# Altium PCB Carte_Alim-light_clav.PcbDoc
Units mm, origin at the board's own origin, x right, y up, seen from the top; angles counter-clockwise.
Board outline 100 x 16 mm, 4 copper layers (Top Copper, Ground Plane, Power Plane, Bottom Copper), stack 1.57 mm thick; 44 components, 108 nets, 128 pads, 82 vias.
Unrouted connection lines stored in the file: 6.
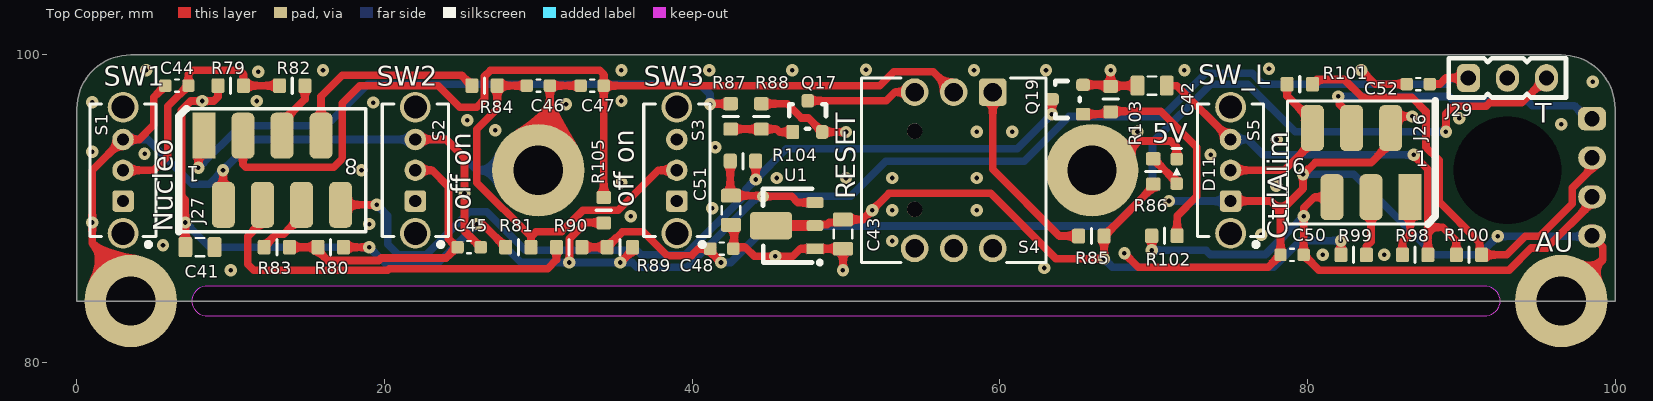
[diagram p0: Top Copper view]
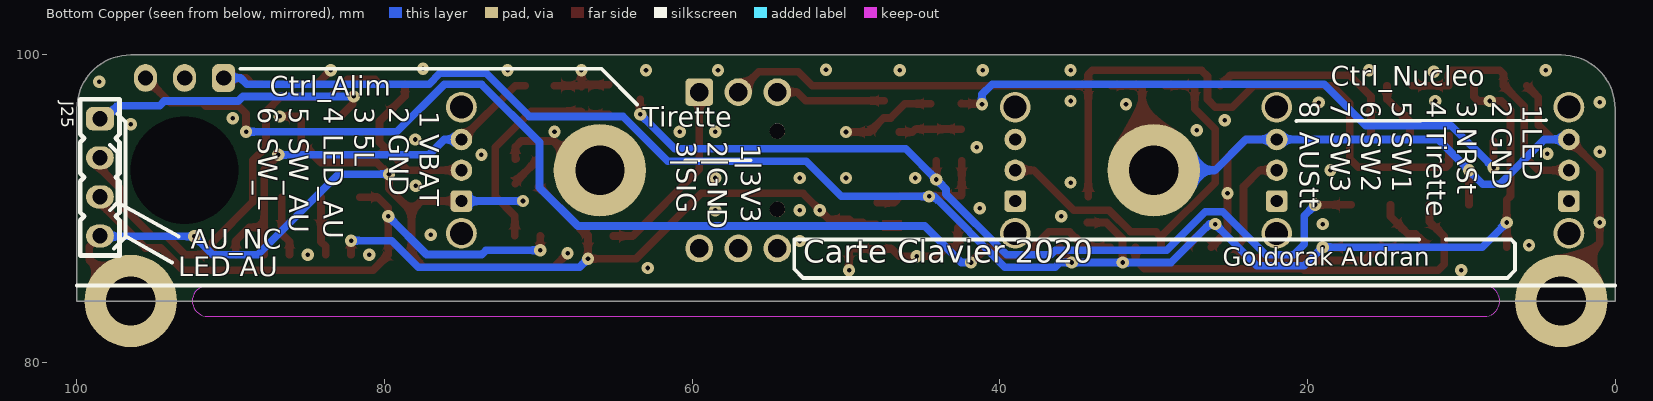
[diagram p1: Bottom Copper view, seen from below]
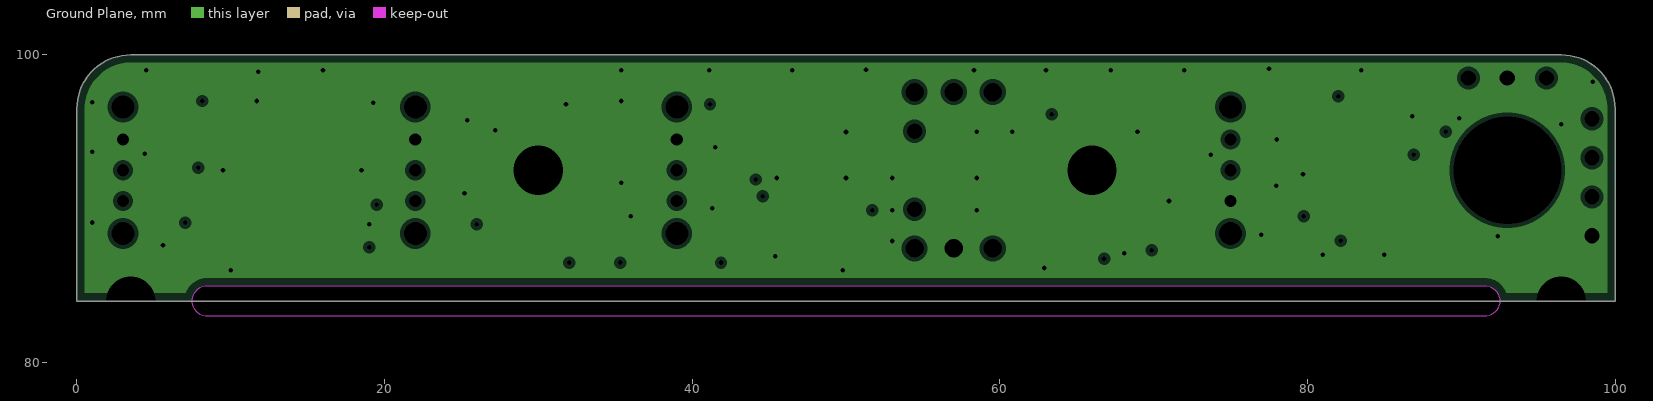
[diagram p2: Ground Plane, clearances drawn from the general rule]
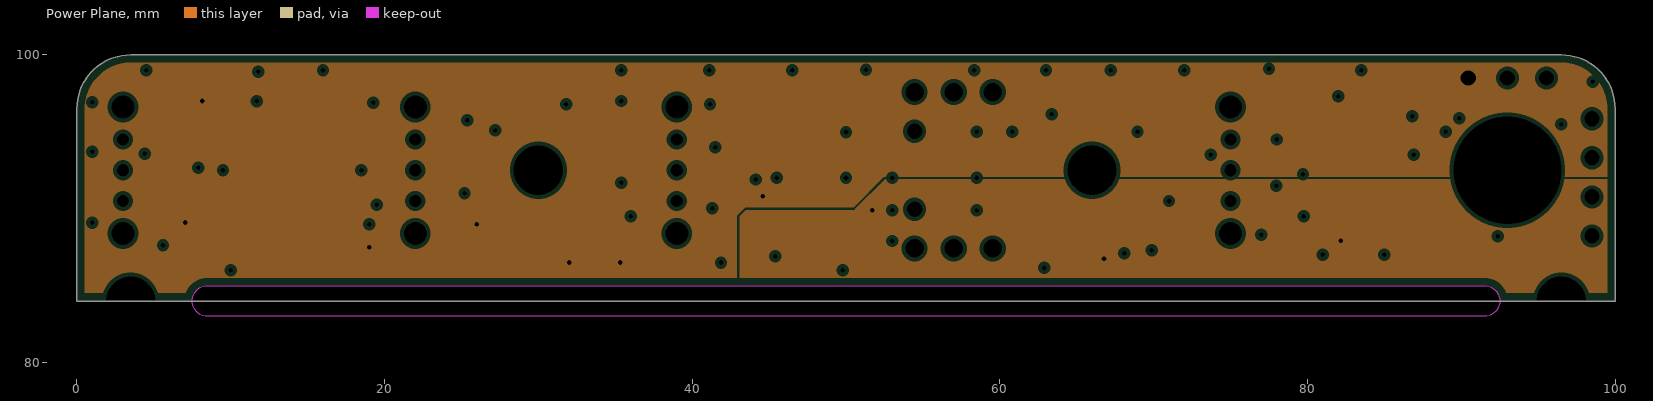
[diagram p3: Power Plane, clearances drawn from the general rule]
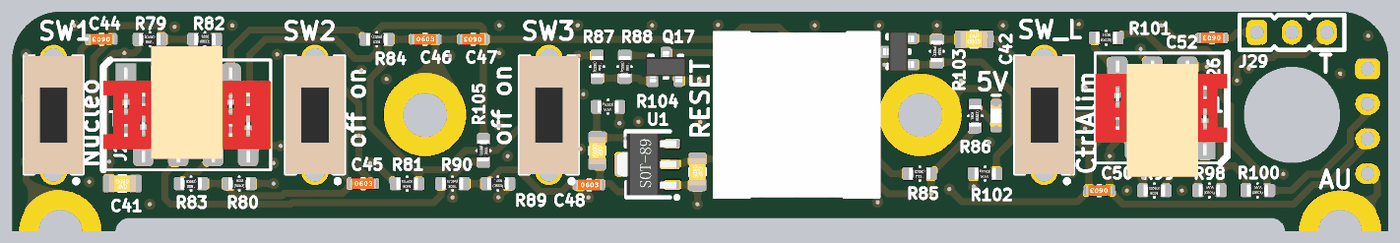
[diagram p4: 3D render of the assembled board from above, using the file's embedded part models]

## Layer stack, top to bottom
Top Mask: solder mask 0.015, Solder Resist, Dk 3.8
Top Copper: signal copper 0.035
Dielectric 1: prepreg 0.2, 7628, Dk 4.6
Ground Plane: plane copper 0.0175, net GND
Core: core 1.065, FR-4, Dk 4.5
Power Plane: plane copper 0.0175
Dielectric 2: prepreg 0.2, 7628, Dk 4.6
Bottom Copper: signal copper 0.035
Bottom Mask: solder mask 0.015, Solder Resist, Dk 3.8

## Board outline
0,84 100,84 100,96.5 ccw(c96.5,96.5) 96.5,100 3.5,100 ccw(c3.5,96.5) 0,96.5
cut-out: 8.5,83 cw(c8.5,84) 8.5,85 91.5,85 cw(c91.5,84) 92.5,84 cw(c91.5,84) 91.5,83

## Design rules (kind name [scope] priority, off if disabled: settings)
AssemblyTestPointUsage [All] p1 off:
AssemblyTestpoint [All] p1 off: testpointundercomponent=TRUE minsize=1.016 maxsize=2.54 preferedsize=1.524 minholesize=0 maxholesize=1.016 preferedholesize=0.813 testpointgrid=0.025 usegrid=TRUE gridtolerance=0 allowsidetop=TRUE allowsidebottom=TRUE
BoardOutlineClearance [All] p1: gap=0.2 ignorepadtopadclearanceinfootprint=FALSE
Clearance Clearance_Power [InNetClass('Power') vs InNet('GND')] p1: gap=0.2 ignorepadtopadclearanceinfootprint=TRUE
Clearance Clearance_Outer_layer [OnOutside] p2: gap=0.127 ignorepadtopadclearanceinfootprint=FALSE except(0.09: Arc-Arc Arc-Track Track-Track; 0.2: Arc-SMDPad Track-SMDPad; 0.254: Arc-Hole Track-Hole SMDPad-Hole THPad-Hole Via-Hole Fill-Hole Poly-Hole Region-Hole Text-Hole; 0.33: Arc-THPad Track-THPad SMDPad-THPad; 0.54: THPad-THPad)
Clearance Clearance_Inner_layer [not OnOutside] p3: gap=0.127 ignorepadtopadclearanceinfootprint=FALSE except(0.2: Arc-SMDPad Track-SMDPad; 0.254: Arc-Hole Track-Hole SMDPad-Hole THPad-Hole Via-Hole Fill-Hole Poly-Hole Region-Hole Text-Hole; 0.33: Arc-THPad Track-THPad SMDPad-THPad; 0.54: THPad-THPad)
ComponentClearance [IsComponent and (not (InComponent('J202') or InComponent('J204'))) vs IsComponent and (not (InComponent('J201') or InComponent('J203')))] p1: gap=0.2 collisioncheckmode=3 verticalgap=2540 showdistances=FALSE
DiffPairsRouting [All] p1 off: maxlimit=0.254 minlimit=0.254 mostfreqgap=0.254 toplayer_minwidth=0.381 toplayer_maxwidth=0.381 toplayer_prefwidth=0.381 bottomlayer_minwidth=0.381 bottomlayer_maxwidth=0.381 bottomlayer_prefwidth=0.381 maxuncoupledlength=12.7
FabricationTestPointUsage TestPointUsage [All] p1 off: valid=0 allowmultiple=FALSE
FabricationTestpoint Testpoint [All] p1 off: side=3 testpointundercomponent=TRUE minsize=1.016 maxsize=2.54 preferedsize=1.524 minholesize=0 maxholesize=1.016 preferedholesize=0.813 testpointgrid=0.025 allowsidetop=TRUE allowsidebottom=TRUE usegrid=TRUE gridtolerance=0
FanoutControl Fanout_BGA [IsBGA] p1 off: bgadir=Out bgaviamode=Centered fanoutstyle=Auto fanoutdirection=Alternating viagrid=0.025 // Fanout_BGA (Default Rule)
FanoutControl Fanout_LCC [IsLCC] p2 off: bgadir=Out bgaviamode=Centered fanoutstyle=Auto fanoutdirection=Alternating viagrid=0.025 // Fanout_LCC (Default Rule)
FanoutControl Fanout_SOIC [IsSOIC] p3 off: bgadir=Out bgaviamode=Centered fanoutstyle=Auto fanoutdirection=Alternating viagrid=0.025 // Fanout_SOIC (Default Rule)
FanoutControl Fanout_Small [(CompPinCount < 5)] p4 off: bgadir=Out bgaviamode=Centered fanoutstyle=Auto fanoutdirection=OutThenIn viagrid=0.025 // Fanout_Small (Default Rule)
FanoutControl Fanout_Default [All] p5 off: bgadir=Out bgaviamode=Centered fanoutstyle=Auto fanoutdirection=Alternating viagrid=0.025 // Fanout_Default (Default Rule)
HoleSize [All] p1: absolutevalues=TRUE maxlimit=6.3 minlimit=0.2 maxpercent=80.000 minpercent=20.000
HoleToHoleClearance ViaToViaClearance [IsVia vs IsVia] p1: gap=0.254 allowstackedmicrovias=TRUE
HoleToHoleClearance [All] p2: gap=0.54 allowstackedmicrovias=TRUE
MinimumAnnularRing [All] p1: minimumring=0.13
MinimumSolderMaskSliver [All] p1: minsoldermaskwidth=0.075
NetAntennae NetAntenna [All] p1: netantennaetolerance=0
PlaneClearance [All] p1: clearance=0.254
PlaneConnect [All] p1: planeconnectstyle=Direct reliefexpansion=0.3 reliefentries=4 reliefconductorwidth=0.3 reliefairgap=0.2
PolygonConnect [All] p1: thpad.connectstyle=Relief thpad.reliefconductorwidth=0.2 thpad.reliefentries=4 thpad.polygonreliefangle="90 Angle" thpad.airgapwidth=0.254 smdpad.connectstyle=Relief smdpad.reliefconductorwidth=0.2 smdpad.reliefentries=4 smdpad.polygonreliefangle="90 Angle" smdpad.airgapwidth=0.254 via.connectstyle=Direct via.reliefconductorwidth=0.2 via.reliefentries=4 via.polygonreliefangle="90 Angle" via.airgapwidth=0.254
RoutingVias [All] p1: holewidth=0.2 width=0.5 viastyle="Through Hole" minholewidth=0.2 minwidth=0.45 maxholewidth=0.3 maxwidth=0.9
SMDEntry [All] p1: side=TRUE corner=TRUE anyangle=TRUE
SilkToSilkClearance [All] p1 off: silktosilkclearance=0.15
SilkToSolderMaskClearance [IsPad] p1: minsilkscreentomaskgap=0.15 clearancetoexposedcopper=TRUE
SolderMaskExpansion [All] p1: expansion=0.05 istentingtop=FALSE
Width Width_Outer_Layer [OnLayer('Component Side') or OnLayer('Solder Side')] p1: maxlimit=5 minlimit=0.09 preferedwidth=0.15
Width Width_Inner_Layer [All] p2: maxlimit=5 minlimit=0.127 preferedwidth=0.15
11 further rules are at their usual default settings.

## Classes and differential pairs
net class Power_low: 3L_CAP 3L_CLAV 3L_M 5L_CAP 5L_CLAV
component class Carte_Alim_TOP: C? D? DC? F? FB? J? Q? R?
net class Power: 5L 5P 12V ALIM_AU BATT_P MOT1_N MOT1_P MOT2_N MOT2_P PWR SW_AU SW_L VBATT VBATT_CLAV

## Components (designator, comment, footprint, x,y, rotation, side; value= is the part's Value field where it differs from the comment)
C41 "1uF" "WCAP-CSGP_0805, 2x1.25x1.25" 8,87.5 r180 top
C42 "1uF" "WCAP-CSGP_0805, 2x1.25x1.25" 69.9,98 r0 top
C43 "10uF" "WCAP-CSGP_0805, 2x1.25x1.25" 49.8,88.35 r270 top
C44 "100nF" "WCAP-CSGP_0603, 1.6x0.8x0.8" 6.5,98 r180 top
C45 "100nF" "WCAP-CSGP_0603, 1.6x0.8x0.8" 25.5,87.5 r0 top
C46 "100nF" "WCAP-CSGP_0603, 1.6x0.8x0.8" 30,98 r0 top
C47 "100nF" "WCAP-CSGP_0603, 1.6x0.8x0.8" 33.5,98 r180 top
C48 "100nF" "WCAP-CSGP_0603, 1.6x0.8x0.8" 41.925,87.4 r0 top
C50 "100nF" "WCAP-CSGP_0603, 1.6x0.8x0.8" 79,87 r180 top
C51 "10uF" "WCAP-CSGP_0805, 2x1.25x1.25" 42.525,89.9 r270 top
C52 "100nF" "WCAP-CSGP_0603, 1.6x0.8x0.8" 87.2,98.1 r180 top
D11 "150060RS75000" SMCW_0603 71.5,92.424 r270 top value=Rouge
J25 "22-03-2041" 22-03-2041 98.5,92.04 r90 bottom
J26 "690367280676" 690367280676 83.5,93 r0 top value=6
J27 "690367280876" 690367280876 12.7,92.5 r180 top value=8
J29 "22-03-2031" 22-03-2031 93,98.5 r180 top
Q17 "2N7002" SOT-23 47.5,96 r0 top
Q19 "2N7002" SOT-23 64.4,97.1 r90 top
R79 "RC0603FR-0710KL" RESC1608X06N 10,98 r180 top value=10k
R80 "RC0603FR-0710KL" RESC1608X06N 16.5,87.5 r0 top value=10k
R81 "RC0603FR-0710KL" RESC1608X06N 28.7,87.5 r180 top value=10k
R82 "RC0603FR-0768RL" RESC1608X06N 14,98 r0 top value=68
R83 "RC0603FR-0768RL" RESC1608X06N 13,87.5 r180 top value=68
R84 "RC0603FR-0768RL" RESC1608X06N 26.5,98 r180 top value=68
R85 "RC0603FR-071KL" RESC1608X06N 65.95,88.225 r180 top value=1k
R86 "RC0603FR-071K8L" RESC1608X06N 69.975,92.424 r90 top value=1.8k
R87 "RC0603FR-0768RL" RESC1608X06N 42.5,96 r270 top value=68
R88 "RC0603FR-0710KL" RESC1608X06N 44.5,96 r270 top value=10k
R89 "RC0603FR-0710KL" RESC1608X06N 35.3,87.5 r0 top value=10k
R90 "RC0603FR-0768RL" RESC1608X06N 32,87.5 r180 top value=68
R98 "RC0603FR-070RL" RESC1608X06N 87,87 r0 top value=0
R99 "RC0603FR-070RL" RESC1608X06N 83,87 r180 top value=0
R100 "RC0603FR-070RL" RESC1608X06N 90.5,87 r0 top value=0
R101 "RC0603FR-070RL" RESC1608X06N 79.5,98.1 r0 top value=0
R102 "RC0603FR-0710KL" RESC1608X06N 70.7,88.232 r180 top value=10k
R103 "RC0603FR-0710KL" RESC1608X06N 67.2,97.125 r270 top value=10k
R104 "RC0603FR-0710KL" RESC1608X06N 43.3,93.1 r180 top value=10k
R105 "RC0603FR-0710KL" RESC1608X06N 34.25,89.9 r270 top value=10k
S1 "OS102011MS2QN1" SW_OS102011MS2QN1 3,92.5 r90 top locked
S2 "OS102011MS2QN1" SW_OS102011MS2QN1 22,92.5 r90 top locked
S3 "OS102011MS2QN1" SW_OS102011MS2QN1 39,92.5 r90 top locked
S4 "440GS67082622" 440xx67082622 57,92.5 r90 top locked
S5 "OS102011MS2QN1" SW_OS102011MS2QN1 75,92.5 r90 top locked
U1 "HT7533-1" SOT89-150P350X160-3N 45.85,88.9 r180 top value=3.3V

## Footprints (in the part's own frame and the unit in brackets; to place one, negate y for a bottom-side part, rotate by r counter-clockwise, add the part's x,y. Pads: shape width x height; smd on the part's side, far side on the other; paste and mask are expansions set on the pad)
22-03-2031 [mm]
  rrect50% 1.5x1.8 hole 1: 1(2.54,0)
  oval 1.5x1.8 hole 1: 2(0,0) 3(-2.54,0)
  silkscreen extent -3.81,-1.27 3.81,1.27, body extent -3.81,-1.27 3.81,1.27, height 11.6
22-03-2041 [mm]
  rrect50% 1.5x1.8 hole 1: 1(3.81,0)
  oval 1.5x1.8 hole 1: 2(1.27,0) 3(-1.27,0) 4(-3.81,0)
  silkscreen extent -5.08,-1.27 5.08,1.27, body extent -5.08,-1.27 5.08,1.27, height 11.6
440xx67082622 [mm]
  rrect30% 1.8x1.8 hole 1.2: 1(5.08,-2.54)
  round 1.8 hole 1.2: 2(5.08,2.54) 3(-5.08,2.54) 4(-5.08,-2.54) A(5.08,0) B(-5.08,0)
  round 1 hole 1 unplated: MH1(-2.54,2.54) MH2(2.54,2.54)
  silkscreen extent -6,-6 6,6, body extent -6,-6 6,6, height 8.3
690367280676 [mm] "6 pins, SMT, straight, without Latch"
  rect 1.5x3 smd: 1(3.175,-2.25)
  rrect50% 1.5x3 smd: 2(1.905,2.25) 3(0.635,-2.25) 4(-0.635,2.25) 5(-1.905,-2.25) 6(-3.175,2.25)
  silkscreen extent -4.81,-4 4.81,4, body extent -4.81,-5 4.81,3.5, height 5.75
690367280876 [mm] "8 pins, SMT, straight, without Latch"
  rect 1.5x3 smd: 1(4.445,-2.25)
  rrect50% 1.5x3 smd: 2(3.175,2.25) 3(1.905,-2.25) 4(0.635,2.25) 5(-0.635,-2.25) 6(-1.905,2.25) 7(-3.175,-2.25) 8(-4.445,2.25)
  silkscreen extent -6.08,-4 6.08,4, body extent -6.08,-5 6.08,3.5, height 5.75
RESC1608X06N [mm] "Chip Resistor, 2-Leads, Body 1,6x0,8mm, IPC Medium Density"
  rrect30% 0.85x0.95 smd: 1(-0.825,0) 2(0.825,0)
  silkscreen extent 0,-0.5 0,0.5, body extent -0.77,-0.43 0.78,0.43, height 0.45
SMCW_0603 [mm] "Chip LED, 2-Leads, Body 1.6x0.8mm, IPC Medium Density"
  rrect30% 0.8x0.8 smd: 1(-0.8,0) 2(0.8,0)
  silkscreen extent -1.5,-0.3 0.25,0.3, body extent -0.8,-0.4 0.8,0.4, height 0.7
SOT89-150P350X160-3N [mm] "SOT89, 3-Leads, Body 4.5x4.1mm, Pitch 1.5mm, Lead Span 1.05mm, IPC Medium Density"
  rect 1.1x0.7 smd paste-0.05 mask+0.102: 1(-2.127,1.5)
  rrect50% 1.1x0.7 smd paste-0.05 mask+0.102: 2(-2.128,0)
  rrect30% 2.75x1.8 smd paste-10: 2(0.728,0)
  rrect30% 1.1x0.7 smd paste-0.05 mask+0.102: 3(-2.127,-1.5)
  Top Copper region: -1.8,-0.351 -0.5,-0.351 -0.5,0.348 -1.8,0.348
  silkscreen extent -2.57,-2.4 1.25,2.52, body extent -2.4,-2.25 1.9,2.25, height 1.53
SOT-23 [mm]
  rrect15% 0.8x0.9 smd: 1(-0.953,-1.016)
  rrect50% 0.8x0.9 smd: 2(0.953,-1.016) 3(0.013,1.016)
  silkscreen extent -1.2,-0.8 1.2,0.8, body extent -1.5,-1.13 1.5,1.13, height 1.22
SW_OS102011MS2QN1 [mm]
  rrect30% 1.4x1.4 hole 0.8: 1(-2,0)
  round 1.4 hole 0.8: 2(0,0) 3(2,0)
  round 2 hole 1.5: None(-4.1,0) None(4.1,0)
  silkscreen extent -4.98,-2.15 4.3,2.15, body extent -4.31,-2.16 4.29,2.14, height 8
"WCAP-CSGP_0603, 1.6x0.8x0.8" [mm] "WCAP-CSGP Ceramic Capacitors, size 0603, body 1.6x0.8x0.8"
  rrect30% 0.8x0.8 smd: 1(-0.75,0) 2(0.75,0)
  silkscreen extent -0.13,-0.4 0.13,0.4, body extent -1,-0.39 1,0.39, height 0.8
"WCAP-CSGP_0805, 2x1.25x1.25" [mm] "WCAP-CSGP Ceramic Capacitors, size 0805, body 2x1.25x1.25"
  rrect30% 0.9x1.3 smd: 1(-0.95,0) 2(0.95,0)
  silkscreen extent -0.28,-0.6 0.28,0.6, body extent -1,-0.63 1,0.62, height 1.25

## Part data
C41 C42: library part "WCAP-CSGP, 885012207103", "CAP CER 1uF 50V X7R 0805", Manufacturer="Wurth Elektronik", Manufacturer Part Number=885012207103, RatedVoltage=50V, CeramicType=X7R, ComponentLink1Description=Datasheet, ComponentLink1URL=http://katalog.we-online.com/pbs/datasheet/885012207103.pdf, Size=0805, SUPPLIER 2=JLCPCB, Supplier Footprint 2=0805, SUPPLIER PART NUMBER 2=C28323
C43 C51: library part "WCAP-CSGP, 885012207026", "CAP CER 10uF 10V X7R 0805", Manufacturer="Wurth Elektronik", Manufacturer Part Number=885012207026, RatedVoltage=10V, SUPPLIER PART NUMBER 1=2495189, CeramicType=X7R, ComponentLink1Description=Datasheet, ComponentLink1URL=http://katalog.we-online.com/pbs/datasheet/885012207026.pdf, Size=0805, SUPPLIER 1=Farnell, SUPPLIER 2=JLCPCB, Supplier Footprint 2=0805, SUPPLIER PART NUMBER 2=C15850
C44 C45 C46 C47 C48 C50 C52: library part "WCAP-CSGP, 885012206095", "CAP CER 100nF 50V X7R 0603", Manufacturer="Wurth Elektronik", Manufacturer Part Number=885012206095, RatedVoltage=50V, CeramicType=X7R, ComponentLink1Description=Datasheet, ComponentLink1URL=http://katalog.we-online.com/pbs/datasheet/885012206095.pdf, Size=0603, SUPPLIER 2=JLCPCB, Supplier Footprint 2=0603, SUPPLIER PART NUMBER 2=C14663
D11: library part "WL-SMCW 0603  150060RS75000", "SMD mono-color Chip LED, WL-SMCW, Red", Manufacturer="Wurth Elektronik", SUPPLIER PART NUMBER 1=2322071, ComponentLink1Description=Datasheet, ComponentLink1URL=http://katalog.we-online.com/led/datasheet/150060RS75000.pdf, Manufacturer Part Number=150060RS75000, SUPPLIER 1=Farnell, SUPPLIER 2=JLCPCB, Supplier Footprint 2=LED_0603, SUPPLIER PART NUMBER 2=C2286
J25: "CONN HEADER VERT 4POS 2.54MM", Manufacturer=MOLEX, SUPPLIER PART NUMBER 1=9731091, ComponentLink1Description=Datasheet, ComponentLink1URL=https://www.molex.com/pdm_docs/sd/022032041_sd.pdf, Manufacturer Part Number=22-03-2041, SUPPLIER 1=Farnell
J26: "WR-MM 6p Female SMT Connector with Polarization", Manufacturer="Wurth Electronics Inc.", SUPPLIER PART NUMBER 1=1641849, ComponentLink1Description=Datasheet, ComponentLink1URL=http://katalog.we-online.de/em/datasheet/69036728xx76.pdf, Manufacturer Part Number=690367280676, SUPPLIER 1=Farnell
J27: "WR-MM 8p Female SMT Connector with Polarization", Manufacturer="Wurth Electronics Inc.", SUPPLIER PART NUMBER 1=1641850, ComponentLink1Description=Datasheet, ComponentLink1URL=http://katalog.we-online.de/em/datasheet/69036728xx76.pdf, Manufacturer Part Number=690367280876, SUPPLIER 1=Farnell
J29: "CONN HEADER VERT 3POS 2.54MM", Manufacturer=MOLEX, SUPPLIER PART NUMBER 1=9731083, ComponentLink1Description=Datasheet, ComponentLink1URL=http://www.farnell.com/datasheets/1785732.pdf, ComponentLink2Description=Drawings, ComponentLink2URL="http://www.farnell.com/cad/495071.pdf  http://www.farnell.com/cad/1533907.pdf  http://www.farnell.com/cad/1533907.pdf", Manufacturer Part Number=22-03-2031, SUPPLIER 1=Farnell
Q17 Q19: "MOSFET N 60V 115MA SOT23", Manufacturer="Changjiang Electronics Tech (CJ)", SUPPLIER PART NUMBER 1=1510761, ComponentLink1Description=Datasheet, ComponentLink1URL=https://datasheet.lcsc.com/szlcsc/1810151612_Changjiang-Electronics-Tech-CJ-2N7002_C8545.pdf, Manufacturer Part Number=2N7002, SUPPLIER 1=Farnell, SUPPLIER 2=JLCPCB, Supplier Footprint 2=SOT-23-3, SUPPLIER PART NUMBER 2=C8545
R79 R80 R81 R88 R89 R102 R103 R104 R105: "RES SMD 10K OHM 1% 1/10W 0603", Manufacturer=Yageo, POWER=100mW, SUPPLIER PART NUMBER 1=9238603, ComponentLink1Description=Manufacturer, ComponentLink1URL=http://www.yageo.com/NewPortal/_en/index.jsp, ComponentLink2Description=Datasheet, ComponentLink2URL=http://www.farnell.com/datasheets/2167052.pdf, Manufacturer Part Number=RC0603FR-0710KL, Precision=±1%, SUPPLIER 1=Farnell, SUPPLIER 2=JLCPCB, Supplier Footprint 2=0603, SUPPLIER PART NUMBER 2=C25804, Type="Thick Film", Vmax=50V
R82 R83 R84 R87 R90: "RES SMD 68 OHM 1% 1/10W 0603", Manufacturer=Yageo, POWER=100mW, SUPPLIER PART NUMBER 1=9238344, ComponentLink1Description=Manufacturer, ComponentLink1URL=http://www.yageo.com/NewPortal/_en/index.jsp, ComponentLink2Description=Datasheet, ComponentLink2URL=http://www.farnell.com/datasheets/1868787.pdf, Manufacturer Part Number=RC0603FR-0768RL, Precision=±1%, SUPPLIER 1=Farnell, SUPPLIER 2=JLCPCB, Supplier Footprint 2=0603, SUPPLIER PART NUMBER 2=C27592, Type="Thick Film", Vmax=50V
R85: "RES SMD 1K OHM 1% 1/10W 0603", Manufacturer=Yageo, POWER=100mW, SUPPLIER PART NUMBER 1=9238484, ComponentLink1Description=Manufacturer, ComponentLink1URL=http://www.yageo.com/NewPortal/_en/index.jsp, ComponentLink2Description=Datasheet, ComponentLink2URL=http://www.farnell.com/datasheets/2167052.pdf, Manufacturer Part Number=RC0603FR-071KL, Precision=±1%, SUPPLIER 1=Farnell, SUPPLIER 2=JLCPCB, Supplier Footprint 2=0603, SUPPLIER PART NUMBER 2=C21190, Type="Thick Film", Vmax=50V
R86: "RES SMD 1.8K OHM 1% 1/10W 0603", Manufacturer=Yageo, POWER=100mW, SUPPLIER PART NUMBER 1=9238514, ComponentLink1Description=Manufacturer, ComponentLink1URL=http://www.yageo.com/NewPortal/_en/index.jsp, ComponentLink2Description=Datasheet, ComponentLink2URL=http://www.farnell.com/datasheets/2167052.pdf, Manufacturer Part Number=RC0603FR-071K8L, Precision=±1%, SUPPLIER 1=Farnell, SUPPLIER 2=JLCPCB, Supplier Footprint 2=0603, SUPPLIER PART NUMBER 2=C4177, Type="Thick Film", Vmax=50V
R98 R99 R100 R101: "RES SMD 0 OHM 1% 1/10W 0603", Manufacturer=Yageo, POWER=100mW, SUPPLIER PART NUMBER 1=2309106, ComponentLink1Description=Manufacturer, ComponentLink1URL=http://www.yageo.com/NewPortal/_en/index.jsp, ComponentLink2Description=Datasheet, ComponentLink2URL=http://www.farnell.com/datasheets/2167052.pdf, Manufacturer Part Number=RC0603FR-070RL, Precision=±1%, SUPPLIER 1=Farnell, SUPPLIER 2=JLCPCB, Supplier Footprint 2=0603, SUPPLIER PART NUMBER 2=C21189, Type="Thick Film", Vmax=50V
S1 S2 S3 S5: "SWITCH SLIDE SPDT 0.1A 12V (500VDC max)", Manufacturer="C & K COMPONENTS", SUPPLIER PART NUMBER 1=1201430, ComponentLink1Description=Datasheet, ComponentLink1URL=https://www.ckswitches.com/media/1428/os.pdf, ComponentLink2Description=Manufacturer, ComponentLink2URL=https://www.ckswitches.com/products/switches/product-details/Slide/OS/OS102011MS2QN1/, Manufacturer Part Number=OS102011MS2QN1, SUPPLIER 1=Farnell
S4: "WS-TATL Illuminated THT Tact Switch, Green", Manufacturer="Wurth Elektronik", SUPPLIER PART NUMBER 1=2402381, ComponentLink1Description=Datasheet, ComponentLink1URL=https://katalog.we-online.com/em/datasheet/440GS67082622.pdf, ComponentLink2Description=Manufacturer, ComponentLink2URL=https://www.we-online.com/catalog/en/TATL_12X12_THT/?sq=440GS67082622#440GS67082622, Manufacturer Part Number=440GS67082622, SUPPLIER 1=Farnell
U1: "LDO 3.3V 100mA SOT89", Manufacturer=Holtek, SUPPLIER PART NUMBER 1=8850721, ComponentLink1Description=Datasheet, ComponentLink1URL=https://datasheet.lcsc.com/szlcsc/1812071811_Holtek-Semicon-HT7533-1_C14289.pdf, ComponentLink2Description=Manufacturer, ComponentLink2URL=https://www.holtek.com/productdetail/-/vg/75xx_1, Manufacturer Part Number=HT7533-1, SUPPLIER 1=RSComponents, SUPPLIER 2=JLCPCB, Supplier Footprint 2=SOT-89-3, SUPPLIER PART NUMBER 2=C14289, Type=LDO

## Free pads (board coordinates)
  round 6 hole 3.2: 0(3.5,84) 0(30,92.5) 0(66,92.5) 0(96.5,84)
  round 6 hole 7 unplated: 0(93,92.5)

## Via types
v1: diameter 0.8, hole 0.3, Top Copper to Bottom Copper, tented both sides, 82 vias

## Nets (pads, with @x,y where several pads share a name; then routed paths per layer and width w, separated by ;. In a path a pad name is that pad's centre, name@x,y a point inside that pad or via, vN(x,y) a via of type N, cw(c..) or ccw(c..) an arc to the next point about the centre after c; other vN are vias at no path point)
3L_CAP: 
3L_CLAV: C41.2 C51.1 C52.1 J29.1 R79.2 R80.2 R81.2 R89.2 R104.2 R105.2 U1.3 | length 125.3
  Top Copper w0.5: C41.2 v1(7.05,89.1) 7.05,90.575 6.8,90.825 6.8,96.4 7.4,97 8.9,97 9.175,97.275 R79.2 ; R80.2 v1(19,87.5) ; v1(26,89) 26.375,89 R81.2 ; v1(32,86.5) 32.023,86.523 32.023,88.056 33.067,89.1 R105.2@34.3,89.1 ; v1(35.325,86.5) 35.95,87.125 35.95,87.325 R89.2 R89.2@36.075,87.5 ; C51.1@42.475,90.9 R104.2 ; C51.1 v1@44.6,90.85 ; v1(44.6,90.8) 46.475,90.8 46.875,90.4 U1.3 ; C52.1 88.6,98.1 89,98.5 J29.1
  Bottom Copper w0.5: v1(7.05,89.1) 8.65,87.5 v1(19,87.5) 20.2,86.3 23.3,86.3 v1(26,89) 26.375,89 28.875,86.5 v1(32,86.5) v1(35.325,86.5) 36.1,86.5 36.4,86.2 39.675,86.2 44.275,90.8 v1(44.6,90.8) 50.3,90.8 52.59,93.09 61.59,93.09 64.5,96 70.6,96 73.4,98.8 76.4,98.8 77.1,98.1 88.963,98.1 89.363,98.5 J29.1
  other v1: 8.15,97
3L_M: 
5L: J26.3 R99.1 | length 3.9
  Top Copper w0.5: R99.1 83.825,87.548 84.135,87.858 J26.3
5L_CAP: 
5L_CLAV: C43.1 R85.1 R86.1 R99.2 U1.2 | length 44.8
  Top Copper w0.5: U1.2@47.978,88.9 48.046,88.968 48.768,88.968 48.909,89.109 49.609,89.109 C43.1 51.1,89.3 v1(51.7,89.9) 52.8,91 59.4,91 63.65,86.75 v1(66.775,86.75) R85.1 66.775,88.275 66.95,88.45 67,88.45 R86.1@69.988,91.438 ; R86.1@69.925,91.5 R86.1@69.975,91.5 ; R99.2 v1(82.175,87.925)
  Bottom Copper w0.5: v1(66.775,86.75) 67.325,86.2 77.8,86.2 79.525,87.925 v1(82.175,87.925)
5L_EN: 
5P: 
5P_EN: 
12V: 
12V_EN: 
ALIM_AU: J25.2 R100.2 R101.2 | length 30
  Top Copper w0.5: R101.2 80.625,98.4 82.4,98.4 83.55,97.25 86.77,97.25 87.7,96.32 87.7,94 88.56,93.14 88.56,90.44 91.182,87.818 91.182,87.143 R100.2 92.954,87 94.154,88.2 95.1,88.2 97.223,90.323 97.223,91.348 98.5,92.625 J25.2
AU_STATUS: J27.8 Q19.3 R104.1 | length 57.1
  Top Copper w0.5: J27.8 v1(19.5,90.25) ; v1(44.125,91.9) R104.1 ; v1(63.384,96.147) Q19.3
  Bottom Copper w0.5: v1(19.5,90.25) 20.2,89.55 20.2,87.7 20.9,87 22.7,87 25.5,89.8 26.644,89.8 29.144,87.3 36.4,87.3 36.7,87 39.547,87 43.5,90.953 43.5,91.275 v1(44.125,91.9) 46.125,93.9 61.136,93.9 v1(63.384,96.147)
BATT_P: 
CAP_#A: 
CAP_#B: 
CAP_#C: 
CAPTTOR_1: 
CAPTTOR_2: 
CAPTTOR_3: 
CAPTTOR_4: 
CAPTTOR_5: 
CAPTTOR_6: 
DNMXL_DATA: 
GND: C41.1 C42.1 C43.2 C44.2 C45.2 C46.2 C47.2 C48.2 C50.2 C51.2 C52.2 D11.1 J25.4 J26.2 J27.2 J29.2 pad.0@3.5,84 pad.0@30,92.5 pad.0@66,92.5 pad.0@96.5,84 Q17.2 Q19.2 R88.1 R103.1 S1.3 S2.3 S3.3 S4.B S5.1 U1.1 | length 159.7
  Top Copper w0.5: pad.0@3.5,85.25 1,87.75 v1(1,89.1) 1,92.5 S1.3 4.05,94.5 4.995,95.445 4.995,97.245 C44.2 ; J27.2@9.5,90.25 v1(9.5,92.5) ; S2.3 24,94.5 25.2,93.3 v1(25.2,91) 25.2,88.55 C45.2 ; pad.0@30,92.5 30.75,93.25 C46.2 C47.2 ; C51.2 42.725,88.75 42.725,87.5 43.45,87.5 44.05,86.9 v1(45.4,86.9) 46.525,86.9 47.025,87.4 U1.1 C43.2 49.807,87.393 v1@49.807,86 ; R88.1 46.175,96.825 47.1,95.9 47.537,95.9 Q17.2 v1(50,94.984) ; Q19.2 R103.1@66.885,98.052 ; pad.0@66,92.5 67.089,92.5 68.989,94.4 71.1,94.4 71.493,94.007 D11.1@71.493,93.293 ; R103.1 R103.1@67.2,98 ; v1(67.2,99) R103.1@67.2,98 ; v1(68.1,87.1) 69,86.2 77.45,86.2 C50.2 78.25,89.85 ; C42.1 R103.1@67.2,98 ; D11.1@71.455,93.255 D11.1@71.493,93.293 ; D11.1 71.493,93.231 D11.1@71.493,93.293 ; D11.1@71.5,93.3 D11.1@71.493,93.293 ; S5.1 77.6,90.5 78.25,89.85 ; v1(83.5,99) 84.4,98.1 C52.2 ; v1(86.818,96) 85.655,96 85.405,95.75 J26.2 85.405,94.27 84.135,93 80.5,93 79.75,92.25 v1(79.71,92.25) 79.71,91.31 78.25,89.85 ; pad.0@96.5,84 99.2,86.7 99.2,87.53 J25.4 J25.4@98.5,88.73
  Bottom Copper w0.5: S1.3 4.6,94.5 7.5,91.6 8.6,91.6 v1(9.5,92.5) 11.5,94.5 S2.3 24,94.5 26,92.5 pad.0@30,92.5 ; v1(71,90.5) 74.6,90.5 74.8,90.3 S5.1 ; v1(79.71,92.25) 83,92.25 88.25,87 91.166,87 v1(92.366,88.2) 98.47,88.2 J25.4
  other v1: 10,86 49.8,86 62.896,86.148 81,87 85,87 5.6,87.625 53,87.9 77,88.3 19,89 36,89.5 53,89.9 58.5,89.9 41.3,90.025 77.964,91.5 35.4,91.7 45.5,92 50,92 53,92 58.5,92 18.5,92.5 73.7,93.509 4.4,93.571 1,93.7 41.5,94 78,94.5 58.5,95 60.8,95 68.95,95 27.2,95.1 96.5,95.5 25.375,95.75 89.861,95.875 31.8,96.8 19.259,96.9 1,96.913 11.7,96.999 35.4,97 98.54,98.25 11.8,98.9 4.5,99 16,99 35.4,99 41.1,99.006 46.5,99 58.325,99 63,99 72,99 51.3,99.037 77.5,99.1
LED_AU: J25.1 J26.4 | length 18.8
  Top Copper w0.5: v1(82,97.3) 82.057,97.243 82.057,96.808 J26.4@82.865,96 ; J25.1 J25.1@98.52,95.87
  Bottom Copper w0.5: v1(82,97.3) 89.2,97.3 89.5,97 94.325,97 94.622,96.703 97.347,96.703 98.2,95.85 J25.1 J25.1@98.52,95.87
LED_NUCLEO: J27.1 R87.1 | length 39.5
  Top Copper w0.5: v1(7.9,92.655) J27.1@7.9,94.395 ; v1@41.191,96.825 R87.1 R87.1@42.487,96.838
  Bottom Copper w0.5: v1(7.9,92.655) 10.645,95.4 16.2,95.4 18.9,98.1 40.5,98.1 41.159,97.441 v1(41.159,96.793)
MOT1_CS: 
MOT1_CS_RAW: 
MOT1_DIR: 
MOT1_DIR_INV: 
MOT1_N: 
MOT1_P: 
MOT1_PWM: 
MOT2_CS: 
MOT2_CS_RAW: 
MOT2_DIR: 
MOT2_DIR_INV: 
MOT2_N: 
MOT2_P: 
MOT2_PWM: 
NetC1_1: 
NetC5_1: 
NetC24_2: 
NetC25_2: 
NetC32_1: 
NetC33_1: 
NetC34_1: 
NetC38_1: 
NetC39_1: 
NetC40_1: 
NetC44_1: C44.1 R79.1 R82.1 S1.2 | length 16.1
  Top Copper w0.5: S1.2 4.995,92.5 5.9,93.405 5.9,96.65 C44.1 7.25,98.75 7.5,99 10.6,99 10.825,98.775 R79.1 R82.1
NetC45_1: C45.1 R80.1 R83.1 S2.2 | length 18.4
  Top Copper w0.5: R83.1 15.425,87.5 16.298,86.627 19.627,86.627 19.8,86.8 24,86.8 24.7,87.5 24.159,88.041 24.159,91.441 23.1,92.5 S2.2
NetC46_1: C46.1 R81.1 R84.1 S3.2 | length 25.7
  Top Copper w0.5: C46.1 R84.1 27.325,96.5 26,95.175 26,91.7 29.525,88.175 ; R81.1 29.525,88.175 ; S3.2 37.8,92.5 35.2,89.9 32.9,89.9 31.5,88.5 29.85,88.5 29.525,88.175
NetC48_1: C48.1 J29.3 R89.1 R90.1 | length 74.3
  Top Copper w0.5: R90.1 R89.1 35.475,88.5 36.824,88.5 38.374,86.95 39.95,86.95 40.4,87.4 C48.1 41.175,87.2 v1@41.817,86.558 ; v1(89,95) 89,96.175 89.477,96.652 91.607,96.652 91.855,96.9 93.94,96.9 J29.3
  Bottom Copper w0.5: v1(41.874,86.501) 42.501,86.501 44.875,88.875 67.425,88.875 69.925,91.375 69.925,94.325 73.7,98.1 76.1,98.1 79.2,95 v1(89,95)
NetD1_2: 
NetD3_2: 
NetD5_2: 
NetD7_2: 
NetD11_2: D11.2 R86.2 | length 2.3
  Top Copper w0.5: R86.2 70.025,93.249 70.2,93.074 70.2,93.024 71.35,91.874 71.35,91.774 D11.2
NetDC1_6: 
NetDC2_4: 
NetDC3_4: 
NetJ19_3: 
NetJ20_3: 
NetJ21_3: 
NetJ22_3: 
NetJ23_3: 
NetJ24_3: 
NetQ2_3: 
NetQ3_1: 
NetQ3_3: 
NetQ4_1: 
NetQ4_3: 
NetQ5_1: 
NetQ5_3: 
NetQ7_15: 
NetQ7_16: 
NetQ7_17: 
NetQ7_20: 
NetQ7_21: 
NetQ7_22: 
NetQ8_15: 
NetQ8_16: 
NetQ8_17: 
NetQ8_20: 
NetQ8_21: 
NetQ8_22: 
NetQ17_1: Q17.1 R87.2 R88.2 | length 4.1
  Top Copper w0.5: R87.2 R88.2 45.5,95.175 45.691,94.984 Q17.1
NetQ17_3: Q17.3 S4.2 | length 7.2
  Top Copper w0.5: Q17.3 52.616,97.016 53.18,97.58 S4.2
NetQ18_3: 
NetQ19_1: Q19.1 R102.1 R103.2 | length 14.7
  Top Copper w0.5: Q19.1 67.047,96.147 R103.2 ; R103.2@67.237,96.338 70.462,96.338 72.8,94 72.8,90.8 71.525,89.525 R102.1
NetR6_2: 
NetR18_2: 
NetR85_2: R85.2 S4.1 | length 12.4
  Top Copper w0.5: S4.1 59.54,92.56 63.875,88.225 R85.2
NRST_NUCLEO: C47.1 J27.3 R105.1 S4.A | length 63.9
  Top Copper w0.5: J27.3 10.795,92.9 10.995,92.7 16.7,92.7 17.25,93.25 17.25,96.85 18.4,98 23.5,98 24.9,96.6 25.983,96.6 26.5,97.117 26.5,98.608 26.892,99 34,99 34.25,98.75 C47.1 ; R105.1@34.25,90.775 C47.1 ; S4.A@57,97.575 55.675,98.9 53.1,98.9 52.2,98 C47.1
nRST_oDrive: 
PWR: 
PWR_CAP: 
SR_OD: 
SW_1: J27.5 R82.2 | length 3.9
  Top Copper w0.5: J27.5 13.335,95.635 14.825,97.125 R82.2
SW_2: J27.6 R83.2 | length 4
  Top Copper w0.5: R83.2 12.175,87.55 12.977,88.352 13.457,88.352 14.605,89.5 J27.6
SW_3: J27.7 R84.2 | length 13.2
  Top Copper w0.5: J27.7 15.875,97.3 17.25,98.675 25,98.675 R84.2
SW_AU: C50.1 J25.3 J26.5 R102.2 | length 38.8
  Top Copper w0.5: R102.2@69.859,88.216 R102.2 v1(69.875,87.3) ; J26.5 80.45,90.75 79.75,90.05 v1(79.75,89.5) C50.1 80.75,86 93.1,86 94.55,87.45 95.55,87.45 98.5,90.4 J25.3 ; J25.3@98.5,91 J25.3@98.5,91.27
  Bottom Copper w0.5: v1(69.875,87.3) 73.4,87.3 73.677,87.023 77.273,87.023 v1(79.75,89.5)
SW_L: J26.6 R101.1 S5.2 | length 10.5
  Top Copper w0.5: S5.2 78.5,92.5 80.325,94.325 J26.6 80.325,95.675 78.675,97.325 R101.1
SW_TIRETTE: J27.4 R90.2 | length 25.6
  Top Copper w0.5: J27.4 12.065,89.157 11.1,88.192 11.1,86.4 11.5,86 20.2,86 20.3,86.1 30.6,86.1 31.175,86.675 R90.2
VBATT: J26.1 R98.1 | length 4
  Top Copper w0.5: R98.1 86.175,87.858 86.675,88.358 J26.1
VBATT_CLAV: C42.2 R98.2 R100.1 S5.3 | length 27.9
  Top Copper w0.5: C42.2 71.5,98 S5.3 ; v1(86.9,93.5) 87.825,92.575 87.825,88.8 ; R98.2 87.825,88.8 ; R100.1 89.675,87.925 88.8,88.8 87.825,88.8
  Bottom Copper w0.5: S5.3 76.108,94.5 77.108,93.5 v1(86.9,93.5)
pads on no net: S1.1 S1.None S2.1 S2.None S3.1 S3.None S4.3 S4.4 S4.MH1 S4.MH2 S5.None

## Polygon pours and split planes (outlines as drawn)
GND on Ground Plane (split plane): 97.084,99.438 97.463,99.337 97.825,99.187 98.164,98.991 98.475,98.752 98.752,98.475 98.991,98.164 99.187,97.825 99.337,97.463 99.438,97.084 99.49,96.696 99.49,96.5 99.49,84.51 92.924,84.51 92.858,84.669 92.811,84.757 92.701,84.921 92.69,84.935 92.638,84.999 92.499,85.138 92.421,85.201 92.257,85.311 92.169,85.358 91.987,85.434 91.936,85.449 91.891,85.463 91.698,85.501 91.599,85.511 8.368,85.511 8.352,85.509 8.335,85.51 8.302,85.504 8.269,85.501 8.253,85.496 8.236,85.493 7.982,85.425 7.966,85.419 7.95,85.416 7.919,85.402 7.888,85.39 7.874,85.381 7.859,85.374 7.631,85.243 7.617,85.233 7.602,85.225 7.576,85.204 7.549,85.184 7.538,85.172 7.525,85.161 7.339,84.975 7.328,84.962 7.316,84.951 7.296,84.924 7.275,84.898 7.267,84.883 7.257,84.869 7.126,84.641 7.119,84.626 7.11,84.612 7.098,84.581 7.084,84.55 7.081,84.534 7.075,84.518 7.073,84.51 0.51,84.51 0.51,96.5 0.51,96.696 0.562,97.084 0.663,97.463 0.813,97.825 1.009,98.164 1.248,98.475 1.525,98.752 1.836,98.991 2.175,99.187 2.537,99.337 2.916,99.438 3.304,99.49 96.696,99.49
5L_CLAV on Power Plane (split plane): 99.49,84.51 92.924,84.51 92.858,84.669 92.811,84.757 92.701,84.921 92.69,84.935 92.638,84.999 92.499,85.138 92.421,85.201 92.257,85.311 92.169,85.358 91.987,85.434 91.936,85.449 91.891,85.463 91.698,85.501 91.599,85.511 43.076,85.511 43.076,89.493 43.507,89.924 50.5,89.924 50.529,89.929 50.554,89.946 52.532,91.924 99.49,91.924
3L_CLAV on Power Plane (split plane): 97.084,99.438 97.463,99.337 97.825,99.187 98.164,98.991 98.475,98.752 98.752,98.475 98.991,98.164 99.187,97.825 99.337,97.463 99.438,97.084 99.49,96.696 99.49,96.5 99.49,92.076 52.5,92.076 52.471,92.071 52.458,92.062 52.446,92.054 50.468,90.076 43.475,90.076 43.446,90.071 43.421,90.054 42.946,89.579 42.929,89.554 42.924,89.525 42.924,85.511 8.368,85.511 8.352,85.509 8.335,85.51 8.302,85.504 8.269,85.501 8.253,85.496 8.236,85.493 7.982,85.425 7.966,85.419 7.95,85.416 7.919,85.402 7.888,85.39 7.874,85.381 7.859,85.374 7.631,85.243 7.617,85.233 7.602,85.225 7.576,85.204 7.549,85.184 7.538,85.172 7.525,85.161 7.339,84.975 7.328,84.962 7.316,84.951 7.296,84.924 7.275,84.898 7.267,84.883 7.257,84.869 7.126,84.641 7.119,84.626 7.11,84.612 7.098,84.581 7.084,84.55 7.081,84.534 7.075,84.518 7.073,84.51 0.51,84.51 0.51,96.5 0.51,96.696 0.562,97.084 0.663,97.463 0.813,97.825 1.009,98.164 1.248,98.475 1.525,98.752 1.836,98.991 2.175,99.187 2.537,99.337 2.916,99.438 3.304,99.49 96.696,99.49

## Other copper
Power Plane (plane layer: these items are gaps in the copper):
  lines w0.15: 0,84 59,84 100,84 ; 43,84 43,89.525 43.475,90 50.5,90 52.5,92 99.857,92 ; 90.5,82.9 91.6,84

## Silkscreen, mask and mechanical layers (free items; w line width, h text height)
Top Overlay:
  text "SW_L" at 72.9,98.1 h1.27
  text "SW1" at 1.75,98 h1.27
  text "SW2" at 19.5,98 h1.27
  text "SW3" at 36.85,98 h1.27
  text "T" at 94.8,95.6 h1.27
  text "5V" at 69.9,94.3 h1.27
  text "RESET" at 50.6,90.6 h1.27 r90
  text "off on" at 36.2,90.1 h1.27 r90
  text "off on" at 25.6,89.9 h1.27 r90
  text "Nucleo" at 6.23,88.5 h1.27 r90
  text "CtrlAlim" at 78.676,88 h1.27 r90
  text "AU" at 94.8,87.2 h1.27
Bottom Overlay:
  lines w0.254: 0,85 100,85 ; 4.5,95.75 20.7,95.7 ; 11,88 6.75,88 6.5,87.75 6.5,86 7,85.5 52.793,85.5 53.362,86.07 53.362,88 12.75,88 ; 56.2,93.15 60.425,93.127 ; 63.575,96.775 65.9,99.1 89.375,99.1 ; 93.4,88.2 97.338,90.395 ; 93.8,86.5 96.775,88.164 ; 97.35,96.15 96.85,95.65 ; 97.6,87.4 96.85,88.15 96.85,95.65 ; 97.85,89.9 97.35,90.4 97.35,93.65 97.85,94.15 ; 96.85,95.65 96.85,95.65
  text "Ctrl_Nucleo" at 18.5,98 h1.27
  text "Ctrl_Alim" at 87.45,97.35 h1.27
  text "2" at 8,97 h1.27 r90
  text "3" at 10.25,97 h1.27 r90
  text "4" at 12.25,97 h1.27 r90
  text "5" at 14.5,97 h1.27 r90
  text "6" at 16.5,97 h1.27 r90
  text "7" at 18.5,97 h1.27 r90
  text "8" at 20.5,97 h1.27 r90
  text "1" at 6,96.75 h1.27 r90
  text "2" at 79.7,96.6 h1.27 r90
  text "3" at 81.95,96.6 h1.27 r90
  text "4" at 83.95,96.6 h1.27 r90
  text "5" at 86.2,96.6 h1.27 r90
  text "6" at 88.2,96.6 h1.27 r90
  text "1" at 77.7,96.35 h1.27 r90
  text "Tirette" at 63.225,95.325 h1.27
  text "LED" at 6,95.25 h1.27 r90
  text "GND" at 8,95.25 h1.27 r90
  text "NRSt" at 10.25,95.25 h1.27 r90
  text "Tirette" at 12.25,95.25 h1.27 r90
  text "SW1" at 14.5,95 h1.27 r90
  text "SW2" at 16.5,95 h1.27 r90
  text "SW3" at 18.5,95 h1.27 r90
  text "AUStt" at 20.5,95 h1.27 r90
  text "VBAT" at 77.7,94.85 h1.27 r90
  text "GND" at 79.7,94.85 h1.27 r90
  text "5L" at 81.95,94.85 h1.27 r90
  text "LED_AU" at 83.95,94.85 h1.27 r90
  text "SW_AU" at 86.2,94.6 h1.27 r90
  text "SW_L" at 88.2,94.6 h1.27 r90
  text "2|GND" at 59,94.4 h1.27 r90
  text "3|SIG" at 61,94.4 h1.27 r90
  text "1|3V3" at 56.8,94.2 h1.27 r90
  text "AU_NC" at 92.6,87.4 h1.27
  text "Carte Clavier 2020" at 52.769,86 h2.5
  text "Goldorak Audran" at 25.5,85.9 h2
  text "LED AU" at 93.4,85.6 h1.27
Board Outline:
  the board outline again, w0.1
Bottom Construction:
  lines w2: 8.5,84 91.5,84

## Dimensions
0,96.5 to 58,81 on Dimension
100,96.5 to 60,81 on Dimension
91,85 to 96.5,100 on Dimension

## Text inside footprints (layer, text, board x,y; h text height)
D11: Top 3D Body "K" at 71.2,93.924 h1 r270
J26: Top Overlay "6" at 79,92.25 h1; Top Overlay "1" at 87,92.75 h1
J27: Top Overlay "8" at 18.25,93.25 h1 r180; Top Overlay "1" at 8,92.75 h1 r180